# Altium PCB GSMM66.PcbDoc
Units mm, origin at the board's own origin, x right, y up, seen from the top; angles counter-clockwise.
Board outline 40.1 x 31 mm, 2 copper layers (Top Layer, Bottom Layer); 53 components, 53 nets, 210 pads, 108 vias.
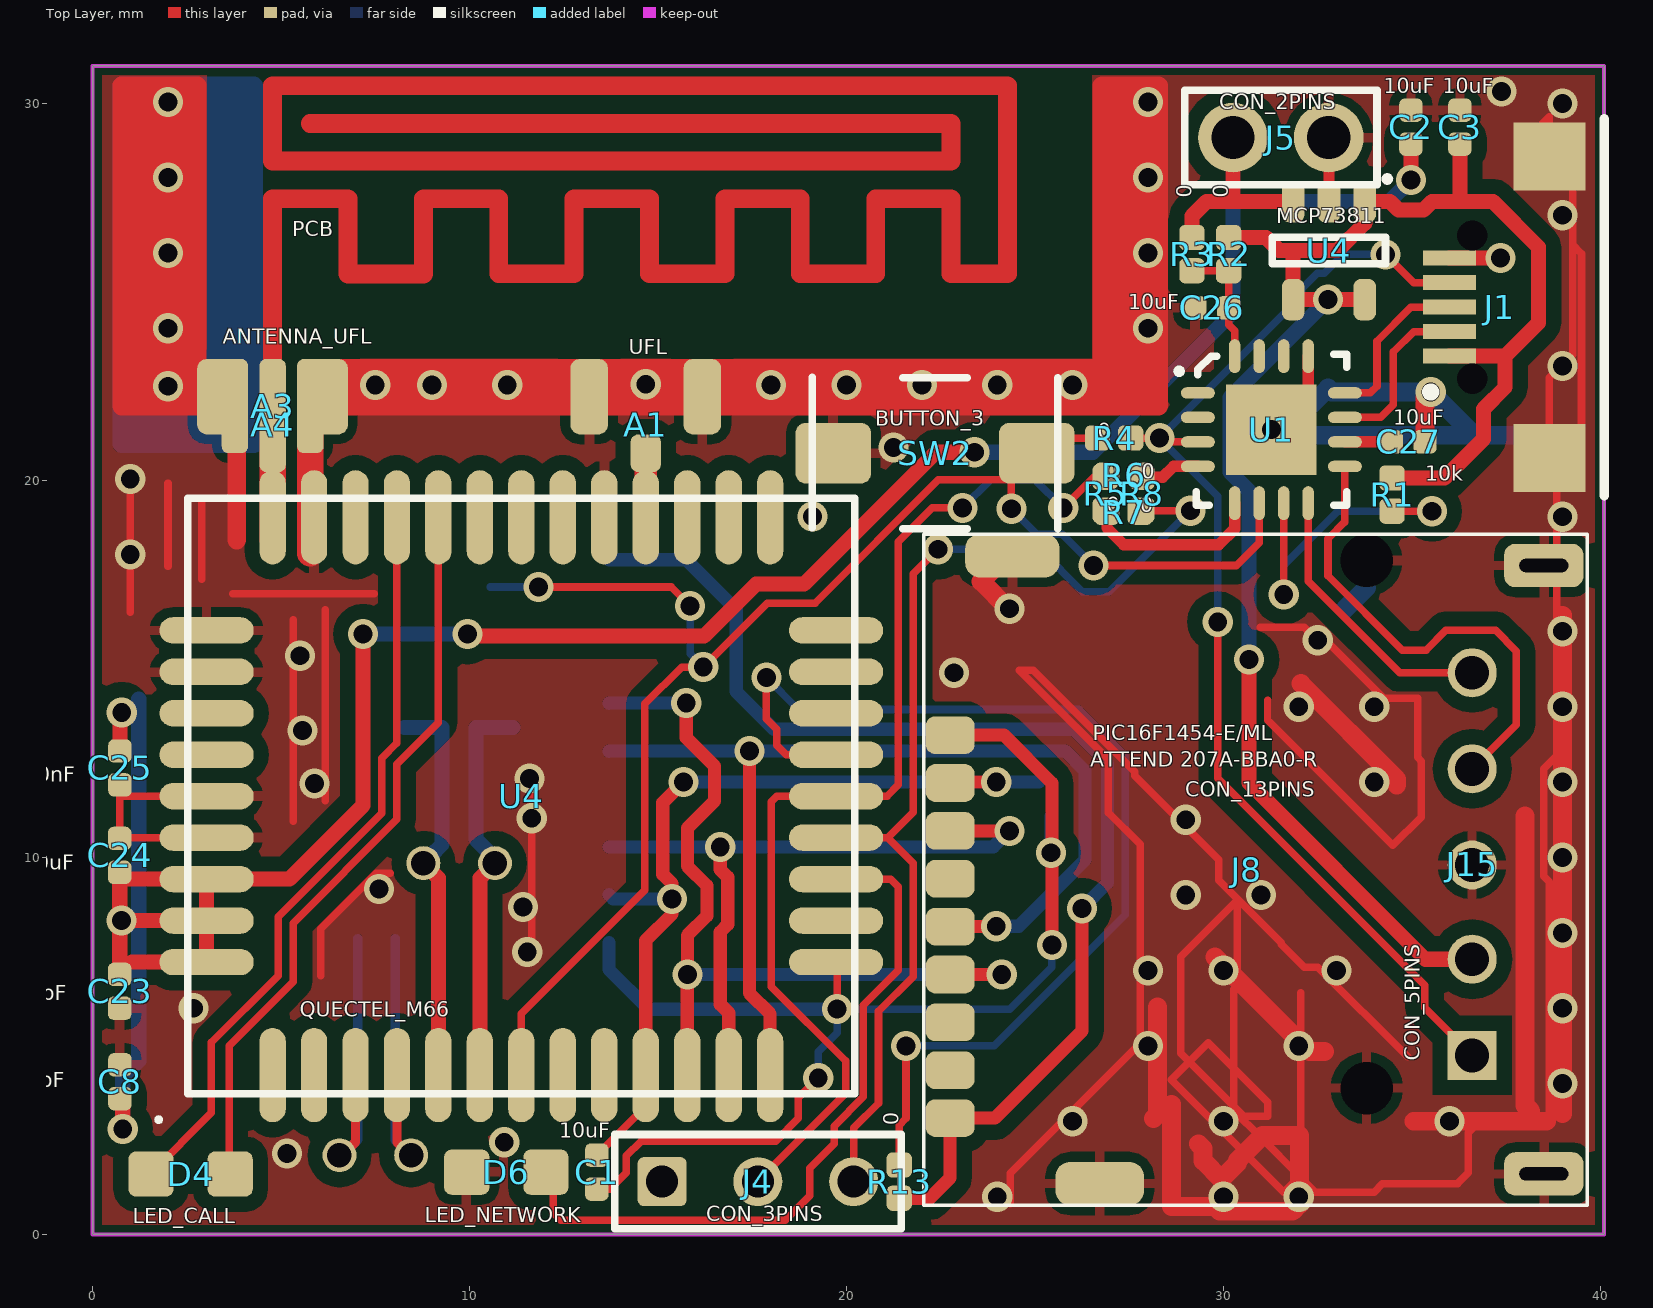
[diagram p0: Top Layer view]
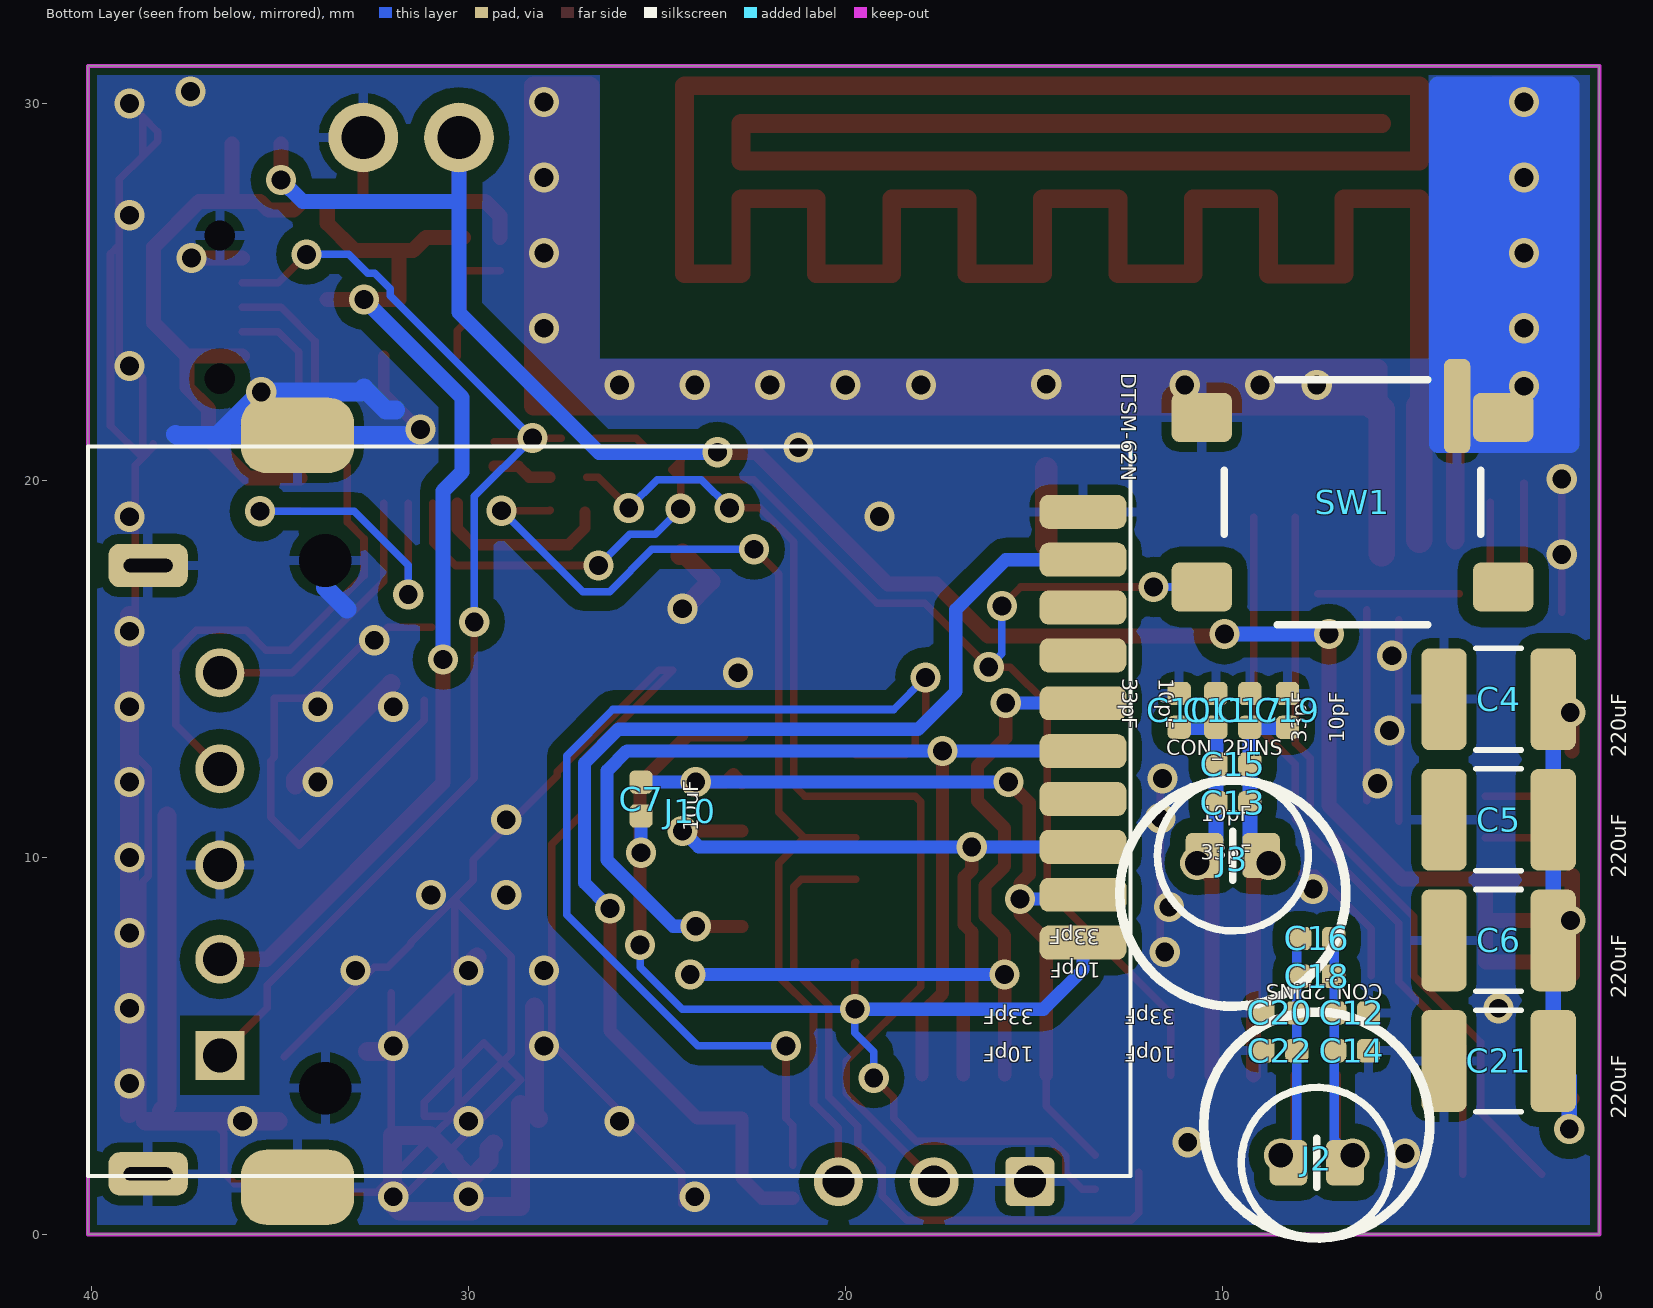
[diagram p1: Bottom Layer view, seen from below]
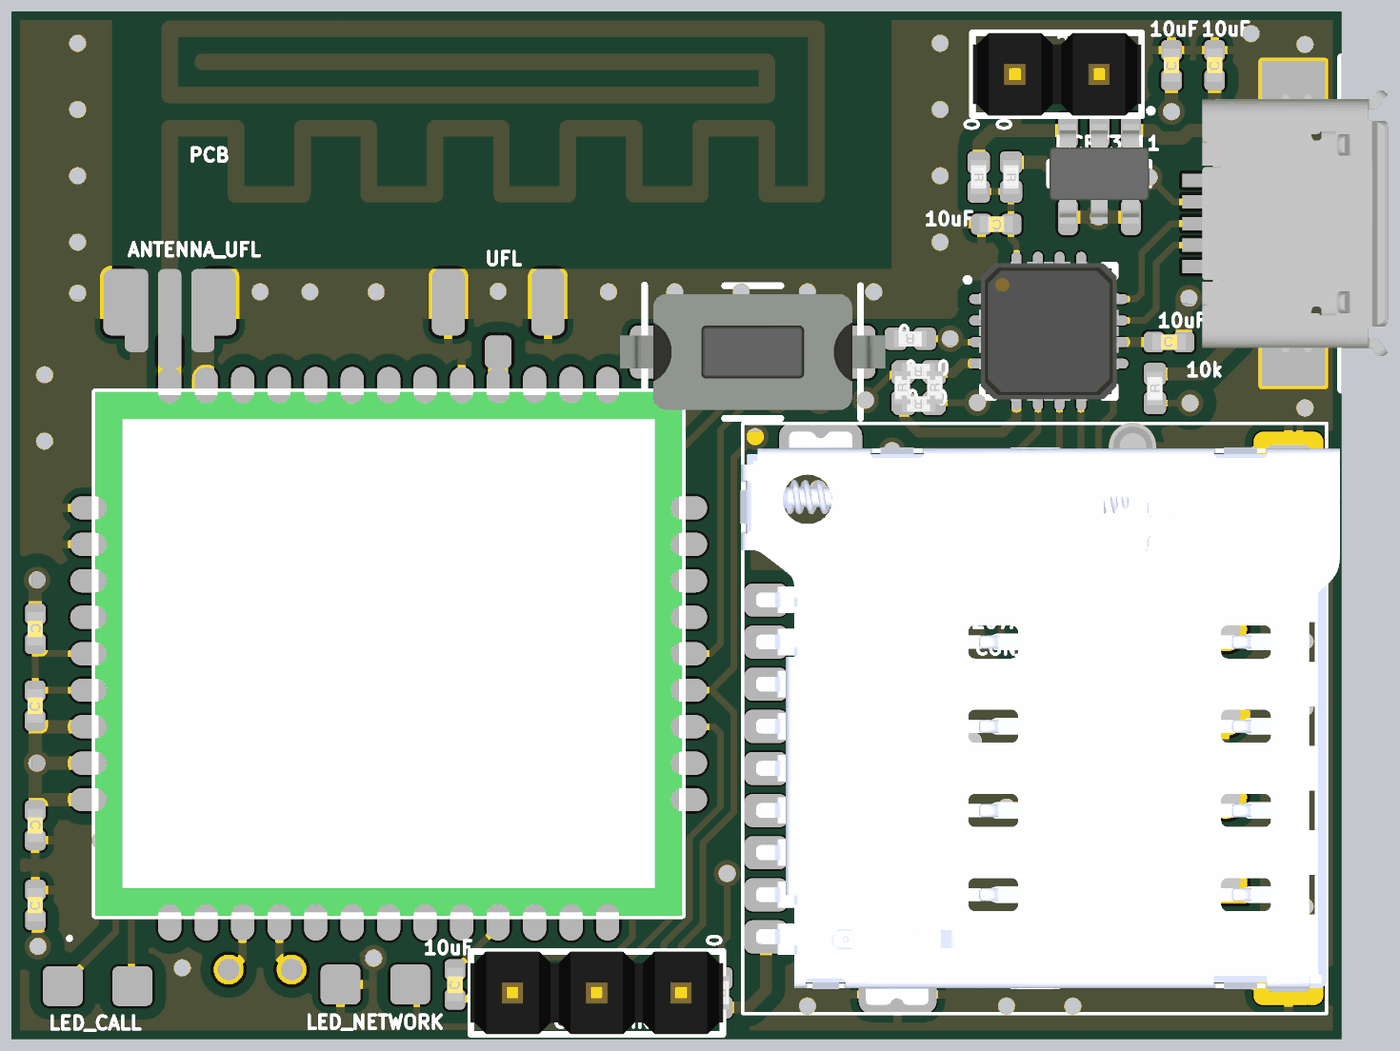
[diagram p2: 3D render of the assembled board from above, using the file's embedded part models]
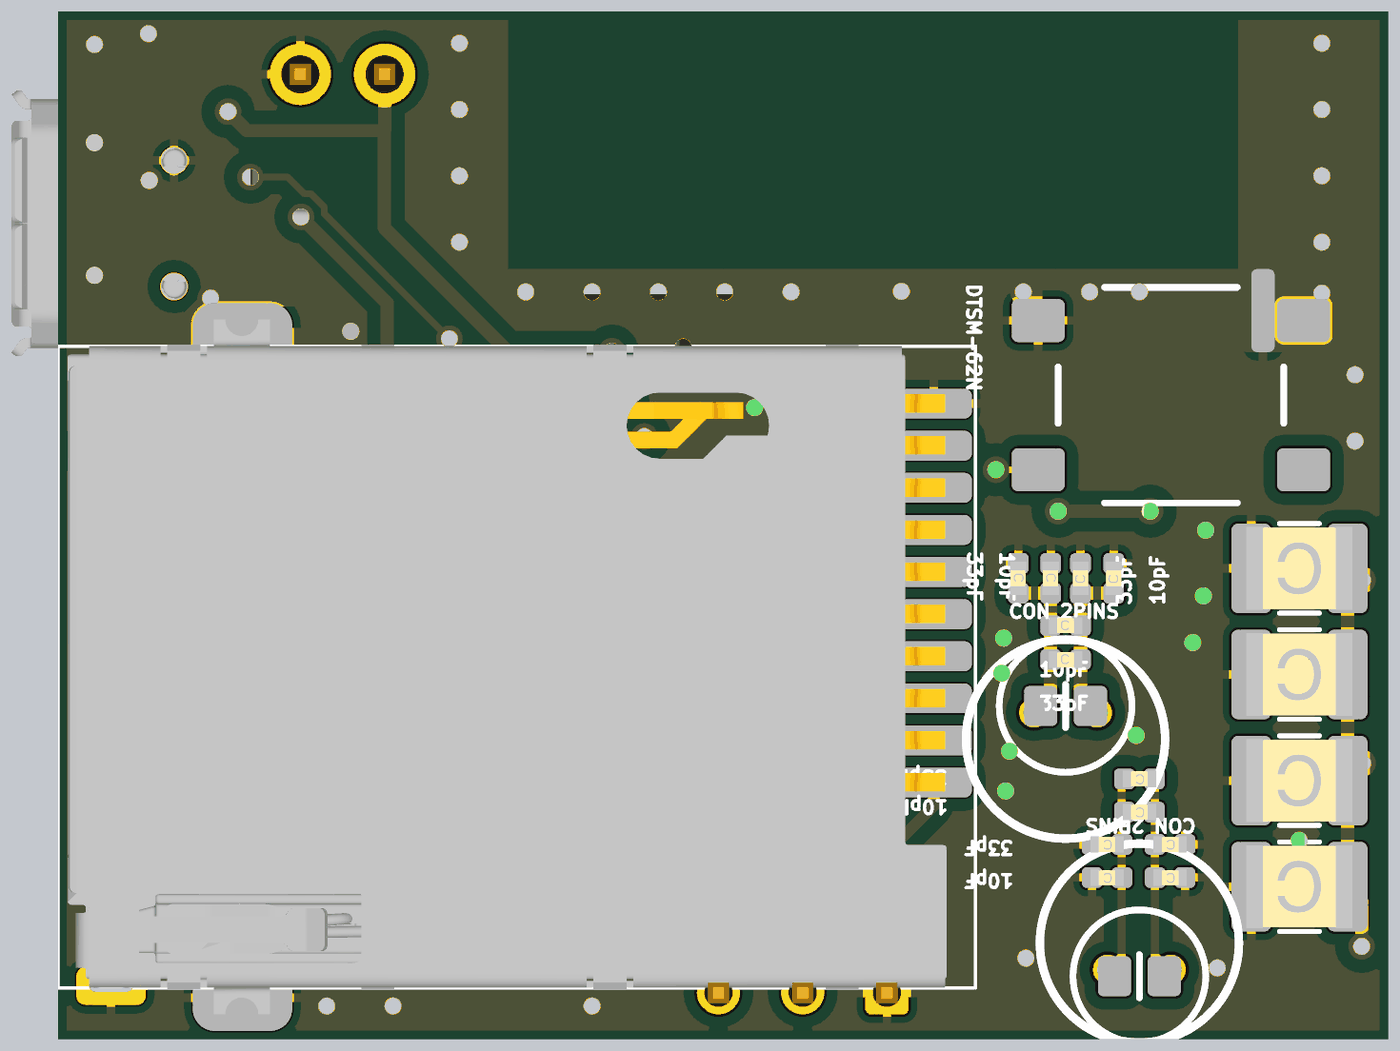
[diagram p3: 3D render of the assembled board from below, using the file's embedded part models]

## Layer stack, top to bottom
Top Solder: solder mask 0.0102, Solder Resist, Dk 3.5
Top Layer: signal copper 0.0356
Dielectric 1: dielectric 0.32, FR-4, Dk 4.8
Bottom Layer: signal copper 0.0356
Bottom Solder: solder mask 0.0102, Solder Resist, Dk 3.5

## Board outline
0,0 0,31 40.1,31 40.1,0

## Design rules (kind name [scope] priority, off if disabled: settings)
Clearance Clearance_PolySmall [InPolygonClass('PolySmallClearance')] p1: gap=0.2
Clearance Clearance_Keepout [All vs OnLayer('Keep-Out Layer')] p2: gap=0.2
Clearance Clearance_Q1Q2Q3 [(InComponent('Q1') OR InComponent('Q2') OR InComponent('Q3')) vs (InComponent('Q1') OR InComponent('Q2') OR InComponent('Q3'))] p3 off: gap=1
Clearance Clearance_110V_NoNet [InNetClass('110V') vs InNet('No Net')] p4 off: gap=0.5
Clearance Clearance_220V_110V [InNetClass('220V') vs InNetClass('110V')] p5 off: gap=1
Clearance Clearance_240VAC_220V [InNet('240VAC') vs InNetClass('220V')] p6 off: gap=1
Clearance Clearance_Poly [All vs InPolygon] p7: gap=0.4
Clearance Clearance_TrackAll [All vs IsTrack] p8: gap=0.2
Clearance Clearance_TrackU4 [InComponent('U4') vs IsTrack] p9 off: gap=0.25
Clearance Clearance_220V [InNetClass('220V')] p10 off: gap=2
Clearance Clearance_110V [InNetClass('110V')] p11 off: gap=1
Clearance [All] p12: gap=0.2
ComponentClearance [All] p1 off: gap=0.254 collisioncheckmode=3 verticalgap=0.254 showdistances=FALSE
Height [All] p1 off: minheight=0 maxheight=25.4 prefheight=12.7
PolygonConnect PolygonConnect_Direct [InPadClass('Flooded')  or InComponentClass ('PolygonDirectConnect')] p1: connectstyle=Direct reliefconductorwidth=0.254 reliefentries=4 polygonreliefangle="90 Angle" airgapwidth=0.254
PolygonConnect PolygonConnect_GND [All vs IsVia] p2: connectstyle=Direct reliefconductorwidth=0.254 reliefentries=4 polygonreliefangle="90 Angle" airgapwidth=0.254
PolygonConnect [All] p3: connectstyle=Relief reliefconductorwidth=0.254 reliefentries=4 polygonreliefangle="90 Angle" airgapwidth=0.254
RoomDefinition GSMM66 [InComponentClass('GSMM66')] p1: confinementstyle=ConfineIn formatcopy=TRUE lockcomponents=FALSE outline -26.4,-25.4 24.4,-25.4 24.4,0 -26.4,0
RoutingVias [All] p1: holewidth=0.711 width=1.27 viastyle="Through Hole" minholewidth=0.711 minwidth=1.27 maxholewidth=0.711 maxwidth=1.27
SolderMaskExpansion [All] p1: expansion=0.102
UnpouredPolygon [All] p1: allowunpoured=FALSE
Width [All] p1: maxlimit=5 minlimit=0.2 preferedwidth=0.5
27 further rules are at their usual default settings.

## Classes and differential pairs
pad class Flooded: J1-7 J1-8

## Components (designator, comment, footprint, x,y, rotation, side; value= is the part's Value field where it differs from the comment)
A1 "UFL" SMD_CON_ANTENNA_UFL#1 14.675,22.225 r0 top
A3 "PCB" SMD_CON_ANTENNA_GSM_PCB 4.775,21.975 r0 top
A4 "ANTENNA_UFL" SMD_CON_ANTENNA_UFL#2 4.775,22.225 r0 top
C1 "10uF" SMD_0402_CAPC1005X90N 13.375,1.65 r90 top
C2 "10uF" SMD_0402_CAPC1005X90N 34.975,29.375 r90 top
C3 "10uF" SMD_0402_CAPC1005X90N 36.275,29.375 r90 top
C4 "220uF" SMD_1210_CAPC3225X279N 2.675,14.2 r0 bottom
C5 "220uF" SMD_1210_CAPC3225X279N 2.675,11 r0 bottom
C6 "220uF" SMD_1210_CAPC3225X279N 2.675,7.8 r0 bottom
C7 "10uF" SMD_0402_CAPC1005X90N 25.425,11.55 r90 bottom
C8 "33pF" SMD_0402_CAPC1005X90N 0.725,4.05 r90 top
C10 "33pF" SMD_0402_CAPC1005X90N 11.15,13.9 r270 bottom
C11 "10pF" SMD_0402_CAPC1005X90N 10.175,13.9 r270 bottom
C12 "33pF" SMD_0402_CAPC1005X90N 6.575,5.875 r0 bottom
C13 "33pF" SMD_0402_CAPC1005X90N 9.725,11.45 r180 bottom
C14 "10pF" SMD_0402_CAPC1005X90N 6.575,4.875 r0 bottom
C15 "10pF" SMD_0402_CAPC1005X90N 9.725,12.475 r180 bottom
C16 "33pF" SMD_0402_CAPC1005X90N 7.5,7.85 r0 bottom
C17 "33pF" SMD_0402_CAPC1005X90N 9.275,13.9 r90 bottom
C18 "10pF" SMD_0402_CAPC1005X90N 7.5,6.85 r0 bottom
C19 "10pF" SMD_0402_CAPC1005X90N 8.275,13.9 r90 bottom
C20 "33pF" SMD_0402_CAPC1005X90N 8.475,5.875 r0 bottom
C21 "220uF" SMD_1210_CAPC3225X279N 2.675,4.6 r0 bottom
C22 "10pF" SMD_0402_CAPC1005X90N 8.475,4.875 r0 bottom
C23 "10pF" SMD_0402_CAPC1005X90N 0.72,6.45 r270 top
C24 "10uF" SMD_0402_CAPC1005X90N 0.717,10.055 r90 top
C25 "100nF" SMD_0402_CAPC1005X90N 0.725,12.375 r270 top
C26 "10uF" SMD_0402_CAPC1005X90N 29.69,24.58 r180 top
C27 "10uF" SMD_0402_CAPC1005X90N 34.9,21.025 r0 top
D4 "LED_CALL" SMD_0805_LED2012X100N 2.6,1.6 r0 top
D6 "LED_NETWORK" SMD_0805_LED2012X100N 10.975,1.65 r180 top
J1 "ATTEND 207A-BBA0-R" SMD_CON_MICRO_USB 36,24.6 r0 top
J2 "CON_2PINS" PTH_MIC_6MM_2.7MM_PITCH1.9 7.5,2.9 r0 bottom
J3 "CON_2PINS" PTH_MIC_6MM_2.7MM_PITCH1.9 9.725,9.05 r180 bottom
J4 "CON_3PINS" PTH_HDRV03W64P254_1X03 17.65,1.4 r180 top
J5 "CON_2PINS" PTH_HDRV02W64P254_1X02 31.525,29.1 r180 top
J8 "CON_13PINS" SMD_CON-ATTEND_MICRO_SIM_115Q-BCA0 38.5,9.675 r90 top locked
J10 "CON_14PINS" SMD_CON-ATTEND_SIM_115A-BDA0-R01 40.1,12 r270 bottom locked
J15 "CON_5PINS" "SIP5 - PGM" 36.6,9.825 r90 top
R1 "10k" SMD_0402_RESC1005X37N 34.475,19.625 r90 top
R2 "0" SMD_0402_RESC1005X37N 30.14,26.005 r270 top
R3 "0" SMD_0402_RESC1005X37N 29.165,26.005 r270 top
R4 "0" SMD_0402_RESC1005X37N 27.1,21.125 r180 top
R5 "0" SMD_0402_RESC1005X37N 26.86,19.65 r90 top
R6 "0" SMD_0402_RESC1005X37N 27.35,20.14 r180 top
R7 "0" SMD_0402_RESC1005X37N 27.35,19.16 r180 top
R8 "0" SMD_0402_RESC1005X37N 27.84,19.65 r90 top
R13 "0" SMD_0402_RESC1005X37N 21.4,1.4 r270 top
SW1 "DTSM-62N" SMD_SW_TACT-64K_5 6.55,19.425 r270 bottom
SW2 "BUTTON_3" SMD_SW_DTSM-3 22.35,20.725 r0 top
U1 "PIC16F1454-E/ML" SMD_QFN50P400X400X90-17N 31.275,21.35 r0 top
U4 "QUECTEL_M66" SMD_MOD_M66-44N 11.375,11.625 r90 top locked
U4 "MCP73811" "SMD_SOT26_SOT95P285X140-5N - DLV" 32.8,26.1 r270 top

## Footprints (in the part's own frame and the unit in brackets; to place one, negate y for a bottom-side part, rotate by r counter-clockwise, add the part's x,y. Pads: shape width x height; smd on the part's side, far side on the other; paste and mask are expansions set on the pad)
PTH_HDRV02W64P254_1X02 [mm]
  round 1.85 hole 1.15 mask+0.075: 1(-1.27,0) 2(1.27,0)
  silkscreen extent -2.55,-1.25 2.55,1.25, body extent -2.54,-1.25 2.54,1.25, height 8
PTH_HDRV03W64P254_1X03 [mm]
  round 1.3 hole 0.85 mask+0.075: 1(-2.54,0) 2(0,0)
  rrect25% 1.3x1.3 hole 0.85 mask+0.075: 3(2.54,0)
  silkscreen extent -3.8,-1.25 3.8,1.25, body extent -3.81,-1.25 3.81,1.25, height 8
PTH_MIC_6MM_2.7MM_PITCH1.9 [mm] "PMO-6027P-40KDQ(20120820)"
  round 0.9 hole 0.65: 1(-0.95,0.8) 2(0.95,0.8)
  rrect33% 1x1.2 smd mask+0.075: 1(-0.75,1) 2(0.75,1)
  silkscreen extent -3,-3 3,3, body extent -2.98,-2.99 3,2.99, height 6.45
"SIP5 - PGM" [mm]
  rect 1.3x1.3 hole 0.9: 1(-5.075,0)
  round 1.3 hole 0.9: 2(-2.525,0) 3(-0.025,0) 4(2.525,0) 5(5.075,0)
SMD_0402_CAPC1005X90N [mm]
  rrect48% 0.62x0.62 smd mask+0.075: 1(-0.45,0) 2(0.45,0)
  body extent -0.5,-0.25 0.5,0.25, height 0.9
SMD_0402_RESC1005X37N [mm]
  rrect45% 0.67x0.67 smd mask+0.05: 1(-0.44,0) 2(0.44,0)
  body extent -0.5,-0.25 0.5,0.25, height 0.37
SMD_0805_LED2012X100N [mm]
  rrect33% 1.2x1.2 smd mask+0.075: 1(-1.05,0) 2(1.05,0)
SMD_1210_CAPC3225X279N [mm]
  rrect35% 1.2x2.7 smd mask+0.075: 1(-1.45,0) 2(1.45,0)
  silkscreen extent -0.6,-1.35 0.6,1.35, body extent -1.6,-1.25 1.6,1.25, height 2.79
SMD_CON-ATTEND_MICRO_SIM_115Q-BCA0 [mm] "ATTEND MicroSIM Holder 115Q-BCA0"
  rrect50% 1x1.3 smd mask+0.05: 1(3.57,15.75) 2(1.03,15.75) 3(-1.51,15.75) 4(-4.05,15.75) 5(2.3,15.75) 6(-0.24,15.75) 7(-2.78,15.75) 8(-5.32,15.75) 9(-6.59,15.75)
  rrect50% 1.15x2.1 hole 0.35 slot 1.3 at 90 deg mask+0.05: 10(-8.07,0) 11(8.07,0)
  rrect67% 1.15x2.35 smd mask+0.05: 12(-8.33,11.78)
  rrect67% 1.15x2.5 smd mask+0.05: 13(8.33,14.1)
  silkscreen extent -8.9,-1.15 8.9,16.45, body extent -8.64,-1.55 8.65,16.52, height 1.63
SMD_CON-ATTEND_SIM_115A-BDA0-R01 [mm] "ATTEND SIM Holder Push Push 115A-BDA0-R01"
  rrect50% 0.9x2.3 smd mask+0.05: 1(4.26,26.4) 2(1.72,26.4) 3(-0.82,26.4) 4(-3.36,26.4) 5(2.99,26.4) 6(0.45,26.4) 7(-2.09,26.4) 8(-4.63,26.4) 9(-5.9,26.4) 10(-7.17,26.4)
  rrect67% 2x3 smd mask+0.05: 11(-9.2,5.56) 12(10.75,5.56)
  rrect50% 0.7x0.7 hole 1.4 mask+0.05: 13(-5.88,6.3) 14(8.12,6.3)
  silkscreen extent -8.9,0 10.45,27.66, body extent -9.71,0.29 11.24,26.79, height 1.85
SMD_CON_ANTENNA_GSM_PCB [mm]
  rrect50% 0.7x2.5 smd: 1(0,0) 2(-1,0) 2(1,0)
  rrect50% 0.7x2.5 smd far side: 2(-1,0)
  Top Layer lines w0.5: -3.5,0 -3.5,8.5 ; -3,0 -3,8.5 -2.5,8.5 -2.5,-0.004 -1.1,0.001 -1.1,0.55 -1,0 ; -2,0.5 -1,0.5 -1,1 -1.5,1 -2,1 ; 0,0.004 0,5.5 2,5.5 2,3.5 4,3.5 4,5.5 6,5.5 6,3.51 8,3.51 8,5.5 10,5.5 10,3.51 12,3.51 12,5.5 14,5.5 14,3.51 16,3.51 16,5.5 18,5.5 18,3.51 19.5,3.51 19.5,8.5 0,8.5 0,6.5 18,6.5 18,7.5 1,7.5 ; 1.1,0.502 22,0.502 ; 1.1,0.504 1.1,0.004 ; 2,0.004 22,0.004 ; 4,0.004 1.1,0.004 ; 22.5,0.004 22.5,8.5 ; 23,0.004 23,8.5 23.5,8.5 ; 1.1,0.004 1.1,1 22,1 22,0.004 ; 1.1,0.004 1.1,1.004 1.1,0.004 ; 22,0.004 23.5,0.004 23.5,8.5 ; 22,0.004 22,8.5 23.5,8.5 ; -4,0 -4,8.5 -2,8.5 -2,0 -4,0 ; -1.1,0.004 -1.1,1.004 -1.1,0.004
  Bottom Layer lines w0.5: -3.5,-1 -4,-1 -4,8.5 -3.5,8.5 ; -3.5,-1 -3.5,8.5 ; -3.5,-1 -3,-1 ; -3.5,8.5 -3,8.5 ; -3,-1 -2.5,-1 ; -3,-1 -3,8.5 ; -3,8.5 -2.5,8.5 ; -2.5,-1 -2.5,8.5 ; -2.5,-1 -2,-1 ; -2.5,8.5 -2,8.5 ; -2,-1 -1.5,-1 ; -2,-1 -2,8.5 ; -2,8.5 -1.5,8.5 ; -1.5,-1 -1,-1 ; -1.5,-1 -1.5,8.5 ; -1.5,8.5 -1,8.5 ; -1,-1 -1,8.5 ; -1,-1 -0.5,-1 -0.5,8.5 -1,8.5
SMD_CON_ANTENNA_UFL#1 [mm]
  rrect50% 0.8x1 smd: 1(0,-1.5)
  rrect50% 1x2 smd: 2(-1.5,0) 2(1.5,0)
SMD_CON_ANTENNA_UFL#2 [mm]
  rrect50% 0.7x1 smd: 1(0,-1.5)
  rrect50% 1x2 smd: 2(-1.5,0) 2(1.5,0)
SMD_CON_MICRO_USB [mm]
  rect 1.4x0.4 smd: 1(0,-1.3) 2(0,-0.65) 3(0,0) 4(0,0.65) 5(0,1.3)
  round 0.7 hole 0.8: 6(0.6,1.9) 9(0.6,-1.9)
  rect 1.9x1.8 smd: 7(2.65,4) 8(2.65,-4)
  silkscreen extent -0.6,-5 4.1,5, body extent -0.1,-4 5.5,4, height 2.7
SMD_MOD_M66-44N [mm] "Quectel M66"
  oval 2.5x0.7 smd mask+0.075: 1(-7.4,6.6) 2(-7.4,5.5) 3(-7.4,4.4) 4(-7.4,3.3) 5(-7.4,2.2) 6(-7.4,1.1) 7(-7.4,0) 8(-7.4,-1.1) 9(-7.4,-2.2) 10(-7.4,-3.3) 11(-7.4,-4.4) 12(-7.4,-5.5) 13(-7.4,-6.6) 23(7.4,-6.6) 24(7.4,-5.5) 25(7.4,-4.4) 26(7.4,-3.3) 27(7.4,-2.2) 28(7.4,-1.1) 29(7.4,0) 30(7.4,1.1) 31(7.4,2.2) 32(7.4,3.3) 33(7.4,4.4) 34(7.4,5.5) 35(7.4,6.6)
  oval 0.7x2.5 smd mask+0.075: 14(-4.4,-8.35) 15(-3.3,-8.35) 16(-2.2,-8.35) 17(-1.1,-8.35) 18(0,-8.35) 19(1.1,-8.35) 20(2.2,-8.35) 21(3.3,-8.35) 22(4.4,-8.35) 36(4.4,8.35) 37(3.3,8.35) 38(2.2,8.35) 39(1.1,8.35) 40(0,8.35) 41(-1.1,8.35) 42(-2.2,8.35) 43(-3.3,8.35) 44(-4.4,8.35)
  silkscreen extent -8.69,-8.85 7.9,9.73, body extent -7.9,-8.85 7.9,8.85, height 2.3
SMD_QFN50P400X400X90-17N [mm]
  oval 0.9x0.3 smd mask+0.05: 1(-1.95,0.975) 2(-1.95,0.325) 3(-1.95,-0.325) 4(-1.95,-0.975) 9(1.95,-0.975) 10(1.95,-0.325) 11(1.95,0.325) 12(1.95,0.975)
  oval 0.3x0.9 smd mask+0.05: 5(-0.975,-1.95) 6(-0.325,-1.95) 7(0.325,-1.95) 8(0.975,-1.95) 13(0.975,1.95) 14(0.325,1.95) 15(-0.325,1.95) 16(-0.975,1.95)
  rect 2.4x2.4 smd paste-1.2 mask+0.05: 17(0,0)
  silkscreen extent -2.6,-2 2,2, body extent -2.1,-2.1 2.1,2.1, height 0.95
"SMD_SOT26_SOT95P285X140-5N - DLV" [mm]
  rrect67% 1.1x0.6 smd mask+0.075: 1(-1.3,0.95) 2(-1.3,0) 3(-1.3,-0.95) 4(1.3,-0.95) 5(1.3,0.95)
  silkscreen extent -2.05,-1.5 0.35,1.7, body extent -1.5,-1.5 1.5,1.5, height 1.2
SMD_SW_DTSM-3 [mm]
  rrect31% 2x1.6 smd mask+0.075: 1(-2.7,0) 2(2.7,0)
  silkscreen extent -3.26,-2 3.25,2.02, body extent -4,-1.75 4,1.75, height 5.5
SMD_SW_TACT-64K_5 [mm]
  rrect31% 1.3x1.6 smd mask+0.075: 1(-2.25,4) 2(-2.25,-4) 3(2.25,4) 4(2.25,-4)
  silkscreen extent -3.25,-3.4 3.25,3.4, body extent -1.74,-1.75 1.75,1.75, height 5

## Part data
A1 A3 A4: library part ANTENNA_2
C1 C2 C3 C4 C5 C6 C7 C8 C10 C11 C12 C13 C14 C15 C16 C17 C18 C19 C20 C21 C22 C23 C24 C25 C26 C27: library part C
D4 D6: library part D
J1: library part CON_USB_MINI
R1 R2 R3 R4 R5 R6 R7 R8 R13: library part R
SW1: library part BUTTON_1
U1: library part IC_PIC16F1454-QFN
U4: library part MOD_QUECTEL_M66
U4: "MCP73812"

## Via types
v1: diameter 0.8, hole 0.5, Top Layer to Bottom Layer, tented both sides, 108 vias

## Nets (pads, with @x,y where several pads share a name; then routed paths per layer and width w, separated by ;. In a path a pad name is that pad's centre, name@x,y a point inside that pad or via, vN(x,y) a via of type N, cw(c..) or ccw(c..) an arc to the next point about the centre after c; other vN are vias at no path point)
5.0V: C3.1 J1.1 J1.9 J15.2 R1.2 R2.1 U4.1@33.75,27.4 U4.4@31.85,24.8 U4.5@33.75,24.8 | length 46.6
  Top Layer w0.4: R2.1 31.13,26.445 31.475,26.1 33.025,26.1 33.75,26.825 33.75,27.4 34.419,27.4 34.644,27.175 35.306,27.175 35.536,27.405 36.275,27.405 C3.1 ; v1(30.675,15.25) 30.675,11.982 35.357,7.3 J15.2 ; 31.85,26.1 31.85,24.8 U4.5@33.75,24.8 ; R1.2 35.865,20.065 36.9,21.1 36.9,21.9 37.475,22.475 37.475,23.3 ; J1.1 37.475,23.3 ; 36.275,27.4 37.15,27.4 38.36,26.19 38.36,24.185 37.475,23.3
  Bottom Layer w0.4: v1(30.675,15.25) 30.675,19.725 30.175,20.225 30.175,22.2 v1(32.775,24.8)
AGND: U4.1@4.775,4.225
BT_ANT: A1.1 U4.26 | length 2
  Top Layer w0.6: U4.26@14.675,18.3 A1.1@14.675,20.325
BTN_CALL: U4.33
BTN_CALL_DENY: U4.30
CD1: 
CD2: 
D+: J1.3 U1.12 | length 4.4
  Top Layer w0.2: U1.12 33.9,22.325 34.075,22.5 34.075,23.7 34.975,24.6 J1.3
D-: J1.2 U1.11 | length 4.5
  Top Layer w0.2: U1.11 34.17,21.675 34.509,22.014 34.509,23.409 35.05,23.95 J1.2
DIV_IN: U4.28
GND: A1.2 A3.2 A4.2 C2.2 C3.2 C4.2 C5.2 C6.2 C8.2 C10.1 C11.1 C12.1 C14.1 C17.2 C19.2 C20.2 C21.2 C22.2 C23.2 C24.2 C25.2 C26.2 C27.2 D6.2 J1.5 J1.6 J1.7 J1.8 J4.3 J5.1 J8.10 J8.11 J8.12 J8.13 J10.10 J10.11 J10.12 J10.13 J10.14 J15.3 SW1.1 SW1.2 SW2.1 U1.13 U1.17 U4.2@32.8,27.4 U4.27 U4.34 U4.36 U4.37 U4.40 U4.41 | length 262
  Top Layer w0.2: C24.2@0.72,10.425 C24.2@0.725,10.43 ; C24.2@0.725,10.425 C24.2@0.725,10.43 ; 1,16.5 v1@1,20.175 ; 2,17.725 2,19.925 ; 2.9,17.375 2.9,19.425 ; U4.41 0.82,10.525 C24.2@0.725,10.43 ; U4.40 0.75,11.625 0.725,11.6 C24.2@0.725,10.43 ; 3.715,17 7.475,17 ; 5.326,10.966 5.326,16.307 ; 6.05,6.859 6.05,8.105 7.52,9.575 7.9,9.575 ; 6.175,11.502 6.175,16.575 ; 11.65,7.875 v1@11.65,12.3 ; v1@24.35,0.817 24.35,1.626 27.795,5.071 27.795,10.347 26.949,11.193 26.949,12.601 24.579,14.971 24.95,14.971 27.65,12.271 27.65,12.168 29.879,9.939 29.879,9.399 31.538,7.74 31.538,7.702 32.149,7.092 32.508,7.092 34.891,4.709 ; 30.982,16.113 32.149,16.113 v1(32.502,15.76) 32.716,15.76 34.253,14.223 35.15,14.223 35.15,12.658 35.25,12.558 35.25,11.073 34.497,10.319 31.175,13.641 31.175,14.175 ; 32.05,6.416 32.05,5.086 32.05,1.573 32.018,1.542 ; J1.8@38.36,20.975 38.36,20.89 J1.8 ; 29.097,4.575 28.865,4.807 28.865,7.361 30.367,8.862 30.367,6.769 30.367,6.594 30.275,6.503 30.275,4.405 ; 29.097,4.575 30.275,3.397 ; 29.097,4.575 28.622,4.101 30.567,2.156 31.6,1.123 32.018,1.542 ; 29.097,4.575 29.601,5.079 30.275,4.405 ; 30.275,3.397 30.275,3.285 30.986,2.574 32.018,1.542 ; 30.275,3.397 30.275,4.405 ; 30.275,3.397 30.536,3.136 31.172,3.136 31.172,3.507 30.275,4.405 ; 32.018,1.542 32.437,1.123 33.998,1.123 34.22,1.345 36.21,1.345 36.5,1.635 36.5,2.698 36.802,3 36.877,3.075 37.7,3.075 37.775,3 37.875,2.9 38.475,2.9 38.575,3 38.65,3.075 38.65,9.35 38.5,9.5 38.5,12.35 38.847,12.697 38.847,20.403 J1.8 ; J1.8 38.65,22.725 39.262,23.338 39.262,26.251 ; J1.8 39.5,21.45 39.5,26.014 39.262,26.251 ; J1.7 39.262,27.987 39.262,26.251 ; J1.7 38.246,29.004 38.246,29.246 38.65,29.65 J1.7
  Top Layer w0.3: v1(31.275,21.35) 32.25,22.325 U1.13 ; J5.1 32.8,29.095 U4.2@32.8,27.4
  Top Layer w0.4: J1.5 v1(37.35,25.9)
  Top Layer w0.5: A4.2@3.275,22.225 3.825,21.675 3.825,18.425 ; A4.2@6.275,22.477 11.477,22.477 11.729,22.225 13.175,22.225 16.175,22.225 16.427,22.477 25,22.477 ; v1(24.325,16.6) 24.295,16.6 23.57,17.325 24.325,18.08 J8.13 ; 27.671,29.4 27.275,29.004 27.275,27 27.775,26.5 ; 27.775,22.625 27.775,26.5 ; v1@27.775,28.158 27.775,26.5 ; 28.148,3.075 28.251,3.179 28.251,6.036 ; 28.622,3.451 28.622,0.741 29.769,0.741 29.897,0.612 31.837,0.612 32.018,0.793 32.018,1.542 32.018,2.624 31.035,2.624 30.986,2.574 30.567,2.156 30.375,1.964 30.375,1.897 29.943,1.465 29.461,1.948 29.461,2.279 29.336,2.403 ; 29.775,7.361 30.367,6.769 32.05,5.086 32.286,4.85 32.683,4.85 ; 32.058,14.615 34.6,12.073 34.6,11.925 ; 35.05,3 36.802,3 37.775,3 38.575,3 ; C27.2 35.35,22.2 v1(35.5,22.35) ; 38,11.1 38,3.424 38.149,3.275 ; 39,3.2 39,16.425
  Top Layer w0.7: A4.2@3.675,21.976 A4.2@3.775,21.876 ; U4.34@5.775,18.075 A3.2@5.775,21.825 ; A4.2@5.775,21.879 5.875,21.979 5.843,21.931 A3.2@5.775,21.825 ; A4.2@6.275,22.225 6.029,21.979 5.842,21.865 A3.2@5.775,21.825
  Bottom Layer w0.5: v1@31.475,21.2 J10.11 36.65,21.2 ; 31.931,21.871 32.196,21.871 32.775,22.45 32.873,22.352 34.178,22.352 34.18,22.35 v1(35.5,22.35) 36.65,21.2 ; 33.223,16.584 33.8,17.161 J10.13 ; 37,21.2 36.65,21.2 ; 37.775,21.227 37.748,21.2 36.65,21.2
  other v1: 24,1 30,1 32,1 5.153,2.15 10.922,2.445 26,3 30,3 36,3 39,4 28,5 32,5 2.681,6 39,6 28,7 30,7 33,7 11.532,7.488 39,8 11.417,8.688 29,9 31,9 7.598,9.163 39,10 29,11 11.65,11.038 5.89,11.963 34,12 39,12 11.593,12.098 5.571,13.372 32,14 34,14 39,14 22.849,14.9 5.5,15.351 39,16 1,18.038 19.1,19.05 39,19.038 1,20.038 21.25,20.875 2,22.5 7.5,22.538 9,22.538 11,22.538 18,22.538 20,22.538 22,22.538 24,22.538 26,22.538 14.675,22.553 39,23.038 2,24.038 28,24.038 2,26.038 28,26.038 39,27.038 2,28.038 28,28.038 39,30 2,30.038 28,30.038 37.375,30.325
GSM_DTR: R13.1 U4.19 | length 28.7
  Top Layer w0.2: v1(17.875,14.775) 17.875,13.675 18.15,13.4 18.15,12.975 18.4,12.725 U4.19 ; R13.1 21.4,2.9 21.579,3.079 v1(21.579,5)
  Bottom Layer w0.2: v1(17.875,14.775) 18.725,13.925 26.172,13.925 27.4,12.697 27.4,8.476 23.924,5 v1(21.579,5)
GSM_PWRKEY: R4.2 SW1.4 SW2.2 U1.6 U4.7 | length 43.7
  Top Layer w0.2: U4.7 11.375,5.85 14.65,9.125 14.65,14.075 15.625,15.05 v1(16.2,15.05) 17.9,16.75 19.165,16.75 22.44,20.025 24.35,20.025 24.613,20.288 24.375,20.525 v1(24.375,19.25) ; v1(11.825,17.175) 15.35,17.175 v1(15.85,16.675) ; SW2.2@24.363,20.538 24.55,20.725 SW2.2 25.15,20.725 25.55,21.125 R4.2 ; v1@26.555,17.745 30.345,17.745 30.95,18.35 U1.6
  Bottom Layer w0.2: SW1.4 v1(11.825,17.175) ; v1(15.85,16.675) 15.85,15.4 v1(16.2,15.05) ; v1(24.375,19.25) 25.05,18.575 25.725,18.575 v1(26.55,17.75)
GSM_RI: U4.20
GSM_RX: J4.2 R5.2 R6.2 U4.18 | length 28.7
  Top Layer w0.2: J4.2 17.65,1.415 19.975,3.74 19.975,4.6 18,6.575 18,11.475 18.15,11.625 U4.18 21.075,11.625 21.375,11.925 21.375,18.375 22.275,19.275 v1(23.075,19.275) ; v1(25.75,19.275) 26.565,20.09 R5.2
  Bottom Layer w0.2: v1(23.075,19.275) 23.825,20.025 25,20.025 v1(25.75,19.275)
GSM_TX: J4.1 R7.1 R8.1 U4.17 | length 29
  Top Layer w0.2: U4.17 21.1,10.525 ; J4.1 20.19,2.824 20.85,3.484 20.85,5.915 21.775,6.84 21.775,9.85 21.1,10.525 ; v1(22.425,18.175) 21.775,17.525 21.775,11.2 21.1,10.525 ; R8.1 27.85,19.2 v1(29.125,19.2)
  Bottom Layer w0.2: v1(22.425,18.175) 25.135,18.175 26.26,17.05 26.975,17.05 v1(29.125,19.2)
GSM_VDD: C2.1 C4.1 C5.1 C6.1 C8.1 C21.1 C23.1 C24.1 C25.1 J5.2 R3.1 U4.3@31.85,27.4 U4.42 U4.43 U4.44 | length 76.6
  Top Layer w0.4: C23.1 C24.1@0.72,9.525 ; C8.1 0.8,3.525 v1(0.8,2.8) ; C25.1 0.725,13.825 0.75,13.85 v1(0.775,13.85) ; v1(0.77,8.325) U4.43 ; C24.1@0.82,9.425 U4.42 ; 1.045,7.225 U4.44 U4.43 ; v1(7.175,15.925) 7.175,11.38 5.22,9.425 U4.42 ; v1(9.95,15.925) 10,15.875 16.225,15.875 17.6,17.25 18.875,17.25 22.375,20.75 v1(23.4,20.75) ; R3.1 29.165,27.015 29.55,27.4 U4.3@31.85,27.4 ; 30.255,27.405 J5.2 ; v1(34.975,27.975) C2.1 ; U4.43 U4.42
  Bottom Layer w0.4: v1(0.8,2.8) 0.8,4.175 C21.1 C6.1 C5.1 C4.1 ; v1(7.175,15.925) v1(9.95,15.925) ; v1(23.4,20.75) 26.546,20.75 30.26,24.464 30.26,27.4 ; J5.2 30.255,27.405 30.26,27.4 ; v1(34.975,27.975) 34.4,27.4 30.26,27.4
LED_GREEN: D4.1 U4.32 | length 20.1
  Top Layer w0.2: D4.1@1.525,1.6 3.15,3.225 3.15,5.091 4.926,6.867 4.926,8.424 7.675,11.173 7.675,12.636 8.075,13.036 U4.32
LED_NETWORK: D6.1 U4.16 | length 19.1
  Top Layer w0.2: D6.1@12.225,1.65 12.225,0.574 12.424,0.375 18.375,0.375 19.025,1.025 19.025,1.75 19.675,2.4 19.675,2.875 20.45,3.65 20.45,6.081 21.375,7.006 21.375,9.225 21.175,9.425 U4.16
LED_RED: D4.2 U4.31 | length 19.7
  Top Layer w0.2: D4.2@3.625,1.6 3.625,5 5.326,6.701 5.326,8.259 8.075,11.008 8.075,12.471 9.175,13.571 U4.31
MCLR: J1.4 J15.1 R4.1 U1.3 | length 31.8
  Top Layer w0.2: R4.1 v1(28.302,21.125) 28.402,21.025 U1.3 ; v1(29.85,16.25) 29.85,12.1 35.337,6.613 35.337,6.013 J15.1 ; v1(34.3,26) 35.05,25.25 J1.4
  Bottom Layer w0.2: v1(29.85,16.25) 29.85,19.577 v1(28.302,21.125) 32.075,24.898 32.075,25.09 32.485,25.5 32.677,25.5 33.177,26 v1(34.3,26)
MCU_RX: R6.1 R8.2 U1.4 | length 1.6
  Top Layer w0.3: R8.2 28.39,20.09 28.675,20.375 U1.4
MCU_TX: R5.1 R7.2 U1.5 | length 4.8
  Top Layer w0.3: R7.2 26.91,18.74 27.35,18.3 29.88,18.3 30.3,18.72 U1.5
MCU_VDD: C26.1 R2.2 R3.2 U1.16 | length 3.3
  Top Layer w0.2: R3.2 R2.2 30.14,24.135 30.3,23.975 U1.16
MICN: C16.2 C18.2 C20.1 C22.1 J2.2 U4.4@8.075,4.225 | length 8.3
  Top Layer w0.25: U4.4@8.075,4.225 8.075,2.45 J2.2@8.475,2.05
  Bottom Layer w0.25: C16.2@8.031,7.85 8.031,2.494 J2.2@8.475,2.05
MICP: C12.2 C14.2 C16.1 C18.1 J2.1 U4.3@6.975,4.225 | length 8.3
  Top Layer w0.25: J2.1@6.575,2.05 6.975,2.45 U4.3@6.975,4.225
  Bottom Layer w0.25: J2.1@6.575,2.05 7.031,2.506 C16.1@7.031,7.85
OUTPUT: U4.29
PGC: J15.5 U1.8 | length 7.4
  Top Layer w0.2: U1.8 32.25,17.325 34.675,14.9 J15.5
PGD: J15.4 U1.9 | length 13
  Top Layer w0.2: U1.9 33.225,18.9 32.775,18.45 32.775,17.475 34.75,15.5 35.375,15.5 35.9,16.025 37.225,16.025 37.775,15.475 37.775,13.525 J15.4
RF_ANT: A3.1 A4.1 U4.35 | length 3.6
  Top Layer w0.7: U4.35@4.775,18.425 A3.1
SD_CD: 
SD_CD/DAT3: 
SD_CLK: 
SD_CMD: 
SD_DAT0: 
SD_DAT1: 
SD_DAT2: 
SD_VDD: 
SD_VSS: 
SIM_CD: J8.9 J10.9 R13.2 | length 31.7
  Top Layer w0.35: R13.2 22.21,0.96 22.75,1.5 J8.9 23.935,3.085 26.25,5.4 v1(26.25,8.65)
  Bottom Layer w0.35: J10.9 15.75,17.9 17.075,16.575 17.075,14.4 18.075,13.4 26.025,13.4 26.925,12.5 26.925,9.325 v1(26.25,8.65)
SIM_CLK: J8.3 J10.3 U4.13 | length 28.3
  Top Layer w0.35: v1(17.425,12.825) 17.425,6.4 17.975,5.85 U4.13 ; J8.3 23.965,8.165 v1(23.975,8.175)
  Bottom Layer w0.35: J10.3 13.705,12.825 25.8,12.825 26.325,12.3 26.325,9.929 24.571,8.175 v1(23.975,8.175)
SIM_GND: C1.2 C7.2 J8.5 J10.5 U4.10 | length 23.6
  Top Layer w0.2: C1.2 14.675,3.4 U4.10
  Top Layer w0.35: U4.10 14.675,7.8 15.375,8.5 v1(15.375,8.9) 15.375,9.3 15.125,9.55 15.125,11.45 v1(15.675,12) ; J8.5 22.975,12.2 23.175,12 v1(23.975,12)
  Bottom Layer w0.35: J10.5 13.81,8.9 v1(15.375,8.9) ; v1(15.675,12) v1(23.975,12) 25.1,12
SIM_IO: J8.7 J10.7 U4.11 | length 22.7
  Top Layer w0.35: v1(15.75,14.1) 15.75,13.175 16.502,12.423 16.502,11.502 15.78,10.78 15.78,9.77 16.3,9.25 16.3,8.45 15.78,7.93 v1(15.78,6.895) 15.775,6.89 U4.11 ; J8.7 v1(24.12,6.895)
  Bottom Layer w0.35: J10.7 13.71,14.1 v1(15.75,14.1) ; v1(15.78,6.895) v1(24.12,6.895)
SIM_RST: J8.2 J10.2 U4.12 | length 18.7
  Top Layer w0.35: v1(16.65,10.275) 16.65,9.678 16.85,9.478 16.85,8.222 16.65,8.022 16.65,6.1 16.875,5.875 U4.12 ; J8.2 v1(24.325,10.705)
  Bottom Layer w0.35: J10.2 23.9,10.28 v1(24.325,10.705)
SIM_VDD: C1.1 C7.1 J8.1 J10.1 U4.14 | length 33.4
  Top Layer w0.2: C1.1 13.725,1.2 14.16,1.635 14.16,2.085 14.551,2.476 18.126,2.476 18.725,3.075 18.725,3.625 v1(19.25,4.15) ; U4.14 19.75,7.2 v1(19.75,5.975)
  Top Layer w0.35: J8.1 24.18,13.245 25.45,11.975 v1(25.45,7.675)
  Bottom Layer w0.2: v1(19.25,4.15) 19.25,4.85 19.75,5.35 v1(19.75,5.975) 24.333,5.975 25.45,7.092 v1(25.45,7.675)
  Bottom Layer w0.35: J10.1 13.7,7.025 14.75,5.975 v1(19.75,5.975) ; v1(25.425,10.125) C7.1
SIM_VPP1: 
SIM_VPP2: J10.6
SIM_VPP3: J8.6
SPK2P: U4.2@5.875,4.225
SPKN: C10.2 C11.2 C13.1 C15.1 J3.1 U4.6 | length 10.4
  Top Layer w0.4: U4.6 10.275,9.45 J3.1@10.675,9.85
  Bottom Layer w0.4: J3.1@10.675,9.975 10.175,10.475 C13.1 C15.1 C11.2 C10.2
SPKP: C13.2 C15.2 C17.1 C19.1 J3.2 U4.5@9.175,4.225 | length 10.7
  Top Layer w0.4: J3.2@8.9,9.85 8.775,9.85 9.175,9.45 U4.5@9.175,4.225
  Bottom Layer w0.4: C19.1 C17.1 C15.2 C13.2 9.275,10.35 8.975,10.05 J3.2@8.775,9.85
USB_DETECT: R1.1 U1.7 | length 8.8
  Top Layer w0.2: v1(31.6,16.975) U1.7 ; R1.1 v1(35.535,19.185)
  Bottom Layer w0.2: v1(31.6,16.975) 31.6,17.75 33.035,19.185 v1(35.535,19.185)
USB_VDD: C27.1 U1.10 | length 1.2
  Top Layer w0.3: U1.10 C27.1
pads on no net: J8.4 J8.8 J10.4 J10.8 SW1.3 U1.1 U1.2 U1.14 U1.15 U4.8 U4.9 U4.15 U4.21 U4.22 U4.23 U4.24 U4.25 U4.38 U4.39

## Polygon pours and split planes (outlines as drawn)
GND on Top Layer "GND" (solid, remove dead copper, pour order 31): 6.74,0 23.24,0 40.1,0 40.1,31 0,31 0,0
GND on Bottom Layer "GND" (solid, remove dead copper, pour order 32): 6.74,0 23.24,0 40.1,0 40.1,31 0,31 0,0

## Keep-outs
Keep-Out Layer:
  the board outline again, w0.1

## Other copper
Top Layer:
  pour cut-out: 3.025,31 3.025,23.225 26.525,23.225 26.525,31
Bottom Layer:
  pour cut-out: 4.525,31 4.525,23.225 26.525,23.225 26.525,31

## Text inside footprints (layer, text, board x,y; h text height)
J4: Mechanical 3 "3" at 14.417,2.35 h0.5 r180; Mechanical 3 "1" at 21.16,2.3 h0.5 r180
J5: Mechanical 3 "1" at 33.835,30.05 h0.5 r180